# Altium PCB PA-03225-V0.4-4.PcbDoc (part 3 of 4)
Units mm, origin at the board's own origin, x right, y up, seen from the top; angles counter-clockwise.
Board outline 43 x 41 mm, 6 copper layers (Top Layer, GND, L3, L4, PWR, Bottom Layer); 103 components, 178 nets, 551 pads, 290 vias.
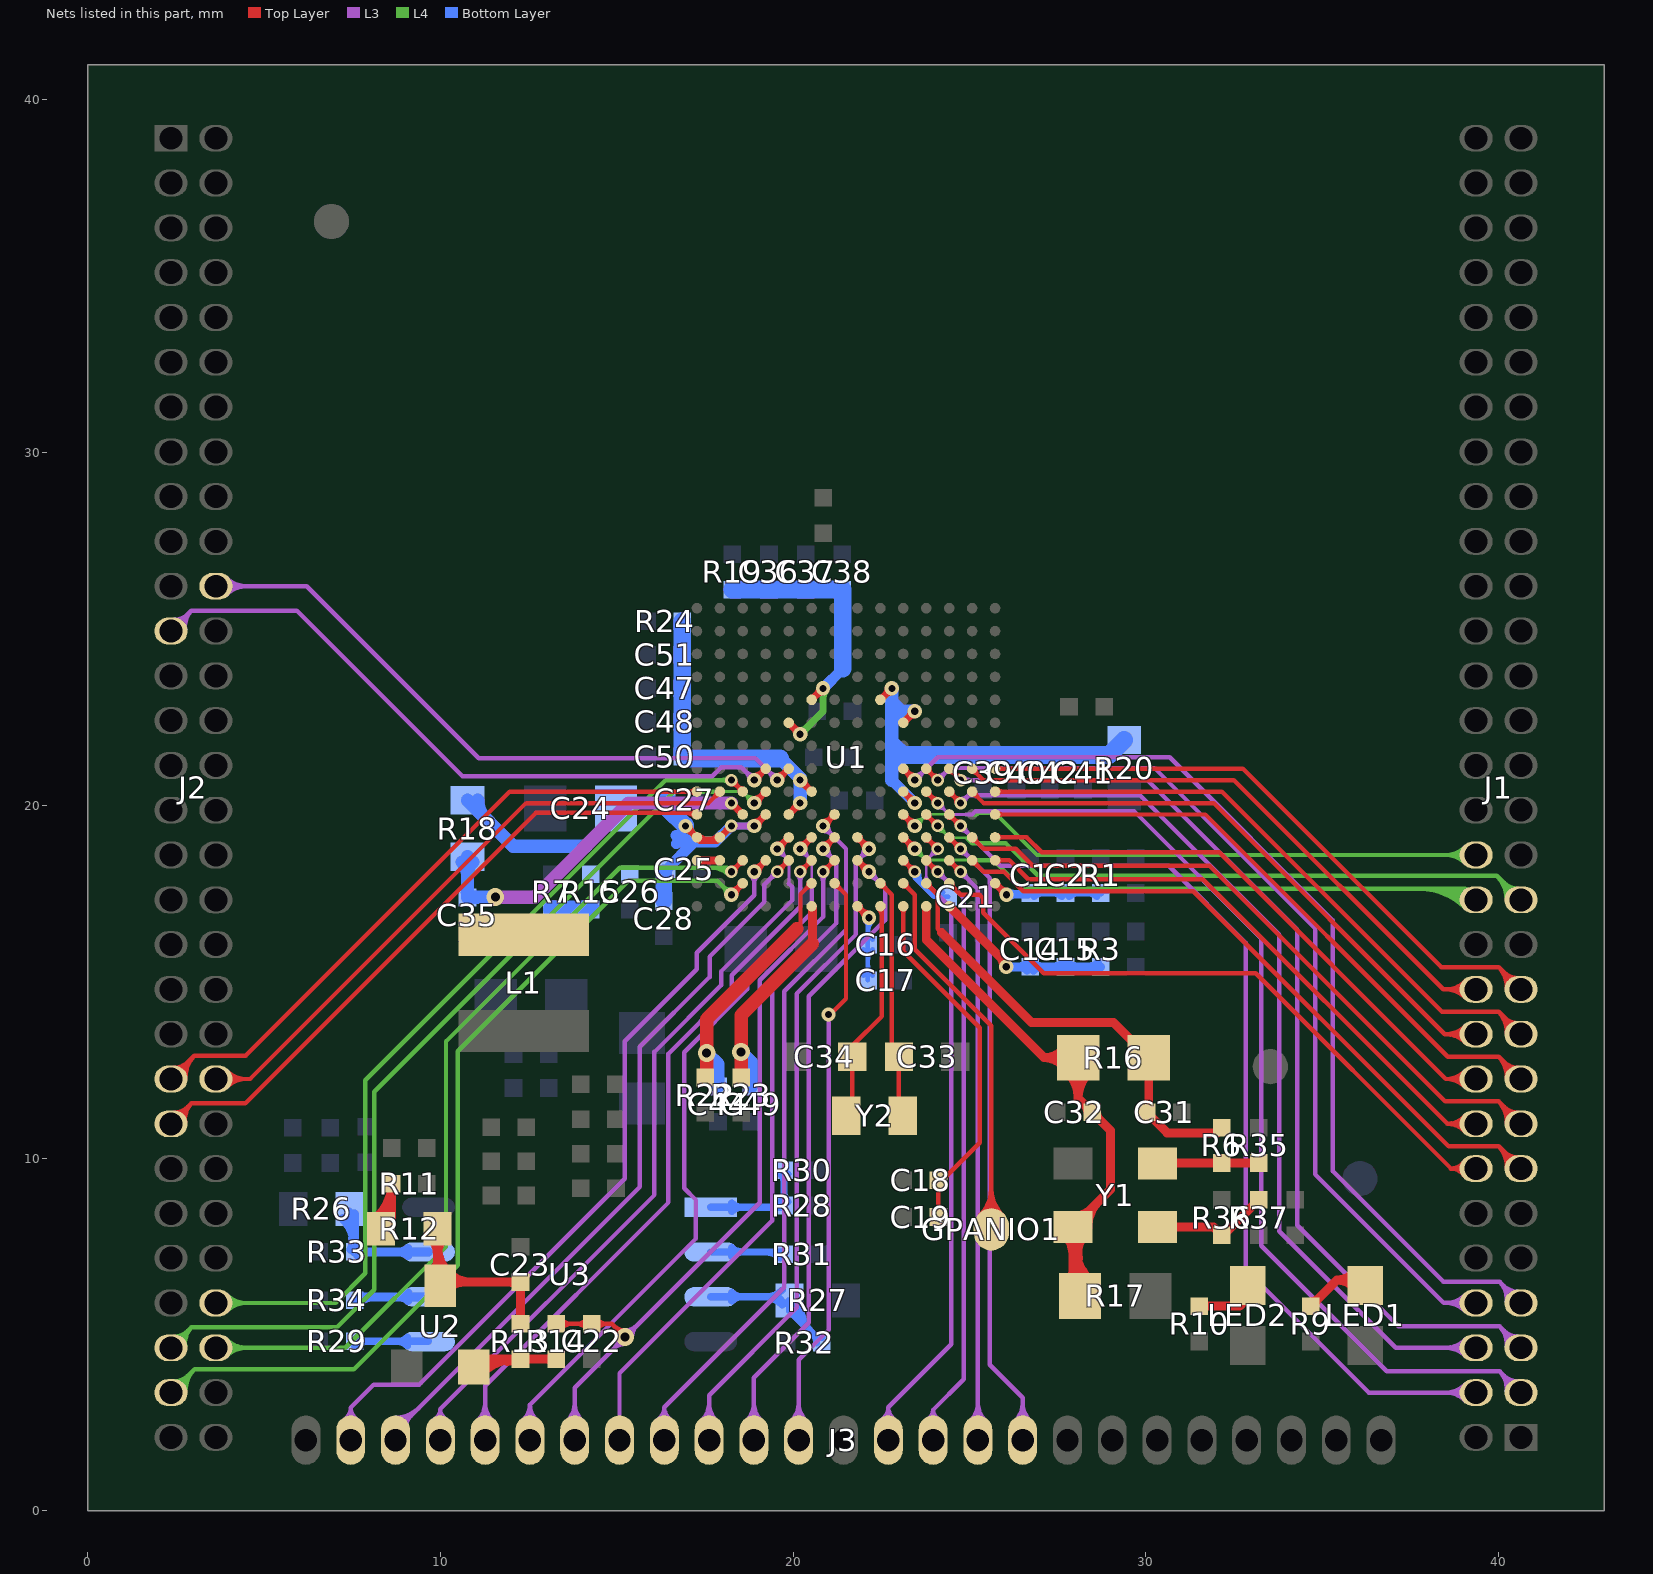
[diagram p7: the nets of this part, all layers, seen from the top]

## Via types
v1: diameter 0.508, hole 0.254, Top Layer to Bottom Layer, tented both sides, 169 vias
v2: diameter 0.406, hole 0.203, Top Layer to Bottom Layer, tented both sides, 78 vias
v3: diameter 0.356, hole 0.203, Top Layer to Bottom Layer, tented both sides, 42 vias
v4: diameter 0.7, hole 0.4, Top Layer to Bottom Layer, tented both sides, 1 vias

## Nets (pads, with @x,y where several pads share a name; then routed paths per layer and width w, separated by ;. In a path a pad name is that pad's centre, name@x,y a point inside that pad or via, vN(x,y) a via of type N, cw(c..) or ccw(c..) an arc to the next point about the centre after c; other vN are vias at no path point) (continued)
H4_SAI2_MCLK: J2.23 U1.H4 | length 23.3
  Top Layer w0.127: v2@18.889,20.858 ccw(c18.864,21.187) U1.H4@19.15,21.022 ; v2(18.9,20.719) U1.H4@19.225,21.044 ; v2@18.9,20.858 ccw(c18.9,21.196) 19.138,20.957 ccw(c19.377,20.719) v2@19.04,20.719 ; v2@18.93,20.855 ccw(c18.963,21.005) 19.096,20.928 ; v2@19.036,20.749 cw(c19.187,20.781) 19.11,20.915 ; v2@19.039,20.708 cw(c19.368,20.683) U1.H4@19.203,20.969 ; U1.H4@19.139,21.044 cw(c18.93,21.044) 19.077,20.896 cw(c19.225,20.748) U1.H4@19.225,20.957
  L3 w0.127: J2.23@2.365,24.945 2.941,25.521 ; J2.23@2.454,25.262 ccw(c2.454,25.814) 2.844,25.424 ; J2.23@2.642,24.973 cw(c3.069,25.038) 2.764,25.343 ; J2.23@2.768,24.992 cw(c3.377,25.085) 2.941,25.521 ; v2@18.76,20.719 ccw(c18.423,20.719) 18.662,20.957 ccw(c18.9,21.196) v2@18.9,20.858 ; v2(18.9,20.719) 18.532,21.087 17.968,21.087 17.709,20.828 10.628,20.828 5.935,25.521 2.941,25.521
H5_SAI2_TX_BLCK: J2.22 U1.H5 | length 23
  Top Layer w0.127: v2@19.539,20.858 ccw(c19.514,21.187) U1.H5@19.8,21.022 ; v2(19.55,20.719) U1.H5@19.875,21.044 ; v2@19.55,20.858 ccw(c19.55,21.196) 19.788,20.957 ccw(c20.027,20.719) v2@19.69,20.719 ; v2@19.58,20.855 ccw(c19.613,21.005) 19.746,20.928 ; v2@19.686,20.749 cw(c19.837,20.781) 19.76,20.915 ; v2@19.689,20.708 cw(c20.018,20.683) U1.H5@19.853,20.969 ; U1.H5@19.789,21.044 cw(c19.58,21.044) 19.727,20.896 cw(c19.875,20.748) U1.H5@19.875,20.957
  L3 w0.127: J2.22@3.635,26.215 6.21,26.215 11.088,21.336 18.933,21.336 v2(19.55,20.719) ; J2.22@3.859,26.08 cw(c4.184,25.755) 4.184,26.215 cw(c4.184,26.675) J2.22@3.859,26.349 ; J2.22@3.948,25.99 cw(c4.49,25.448) 4.49,26.215 cw(c4.49,26.981) J2.22@3.948,26.439 ; v2@19.41,20.719 ccw(c19.073,20.719) 19.312,20.957 ccw(c19.55,21.196) v2@19.55,20.858
H10: J1.7 U1.H10 | length 32.4
  Top Layer w0.127: U1.H10@23.125,20.957 cw(c23.125,20.748) 23.273,20.896 cw(c23.42,21.044) U1.H10@23.212,21.044 ; U1.H10@23.125,21.044 v2(23.45,20.719) ; U1.H10@23.147,20.969 cw(c22.982,20.683) v2@23.311,20.708 ; U1.H10@23.2,21.022 ccw(c23.486,21.187) v2@23.461,20.858 ; 23.24,20.915 cw(c23.163,20.781) v2@23.314,20.749 ; 23.254,20.928 ccw(c23.387,21.005) v2@23.42,20.855 ; v2@23.31,20.719 ccw(c22.973,20.719) 23.212,20.957 ccw(c23.45,21.196) v2@23.45,20.858
  L3 w0.127: v2(23.45,20.719) 24.1,21.369 30.677,21.369 35.306,16.74 35.306,9.627 38.431,6.502 40.028,6.502 ; v2@23.45,20.858 ccw(c23.45,21.196) 23.689,20.957 ccw(c23.927,20.719) v2@23.59,20.719 ; 40.156,6.374 ccw(c40.546,6.764) J1.7@40.546,6.213 ; 40.216,6.314 cw(c39.87,5.968) J1.7@40.357,5.915 ; J1.7@40.23,5.929 ccw(c39.531,6.004) 40.028,6.502 ; J1.7@40.635,5.895 40.028,6.502
H11_SAI1_TX_DATA0: J1.8 U1.H11 | length 29.4
  Top Layer w0.127: U1.H11@23.775,20.957 cw(c23.775,20.748) 23.923,20.896 cw(c24.07,21.044) U1.H11@23.862,21.044 ; U1.H11@23.775,21.044 v3(24.1,20.719) ; v3@23.986,20.719 ccw(c23.71,20.719) 23.905,20.914 ccw(c24.1,21.109) v3@24.1,20.833
  L3 w0.127: v3(24.1,20.719) 24.443,21.061 30.247,21.061 34.798,16.51 34.798,9.543 38.446,5.895 J1.8@39.365,5.895 ; v3@24.1,20.833 ccw(c24.1,21.109) 24.295,20.914 ccw(c24.49,20.719) v3@24.214,20.719 ; J1.8@39.052,5.67 ccw(c38.51,5.128) 38.51,5.895 ccw(c38.51,6.662) J1.8@39.052,6.12 ; J1.8@39.141,5.76 ccw(c38.816,5.435) 38.816,5.895 ccw(c38.816,6.355) J1.8@39.141,6.03
H12: J1.5 U1.H12 | length 30.6
  Top Layer w0.127: U1.H12@24.425,20.957 cw(c24.425,20.748) 24.573,20.896 cw(c24.72,21.044) U1.H12@24.512,21.044 ; U1.H12@24.425,21.044 v3(24.75,20.719) ; v3@24.636,20.719 ccw(c24.36,20.719) 24.555,20.914 ccw(c24.75,21.109) v3@24.75,20.833
  L3 w0.127: v3(24.75,20.719) 30.047,20.719 34.29,16.476 34.29,8.103 37.161,5.232 40.028,5.232 ; v3@24.831,20.638 cw(c25.026,20.443) 25.026,20.719 cw(c25.026,20.995) v3@24.831,20.799 ; 40.156,5.104 ccw(c40.546,5.494) J1.5@40.546,4.943 ; 40.216,5.044 cw(c39.87,4.698) J1.5@40.357,4.645 ; J1.5@40.23,4.659 ccw(c39.531,4.734) 40.028,5.232 ; J1.5@40.635,4.625 40.028,5.232
H13: J1.22 U1.H13 | length 19.1
  Top Layer w0.127: U1.H13@25.075,20.957 cw(c25.075,20.748) 25.223,20.896 cw(c25.37,21.044) U1.H13@25.162,21.044 ; U1.H13@25.075,21.044 25.4,20.719 32.499,20.719 38.433,14.785 J1.22@39.365,14.785 ; J1.22@39.052,14.56 ccw(c38.51,14.018) 38.51,14.785 ccw(c38.51,15.552) J1.22@39.052,15.01 ; J1.22@39.141,14.65 ccw(c38.816,14.325) 38.816,14.785 ccw(c38.816,15.245) J1.22@39.141,14.92
H14: J1.21 U1.H14 | length 19.4
  Top Layer w0.127: U1.H14@25.725,21.044 32.754,21.044 38.379,15.418 40.002,15.418 ; U1.H14@25.786,20.982 cw(c25.934,20.835) 25.934,21.044 cw(c25.934,21.252) U1.H14@25.786,21.105 ; 40.156,15.264 ccw(c40.546,15.654) J1.21@40.546,15.103 ; 40.199,15.221 cw(c39.815,14.838) J1.21@40.356,14.799 ; J1.21@40.229,14.808 ccw(c39.449,14.864) 40.002,15.418 ; J1.21@40.635,14.785 40.002,15.418
J1_LPSPI1_SDO: J2.43 U1.J1 | length 20.3
  Top Layer w0.127: J2.43@2.365,12.245 3.024,12.904 ; J2.43@2.454,12.562 ccw(c2.454,13.114) 2.844,12.724 ; J2.43@2.644,12.252 cw(c3.242,12.276) 2.819,12.699 ; J2.43@2.771,12.257 cw(c3.637,12.291) 3.024,12.904 ; U1.J1@17.214,20.332 ccw(c17.066,20.185) 17.066,20.394 ccw(c17.066,20.602) U1.J1@17.214,20.455 ; U1.J1@17.275,20.394 11.967,20.394 4.477,12.904 3.024,12.904
J2: J2.44 U1.J2 | length 19.9
  Top Layer w0.127: J2.44@3.684,12.245 4.605,12.245 12.429,20.069 17.6,20.069 U1.J2@17.925,20.394 ; J2.44@3.859,12.11 cw(c4.184,11.785) 4.184,12.245 cw(c4.184,12.705) J2.44@3.859,12.379 ; J2.44@3.948,12.02 cw(c4.49,11.478) 4.49,12.245 cw(c4.49,13.011) J2.44@3.948,12.469 ; U1.J2@17.839,20.394 cw(c17.63,20.394) 17.777,20.246 cw(c17.925,20.098) U1.J2@17.925,20.307
J3_LPSPI1_PCS0: J2.54 U1.J3 | length 27.5
  Top Layer w0.127: v3@18.25,20.604 cw(c18.25,20.328) 18.445,20.523 cw(c18.64,20.719) v3@18.364,20.719 ; v3(18.25,20.719) U1.J3@18.575,20.394 ; U1.J3@18.489,20.394 ccw(c18.28,20.394) 18.427,20.541 ccw(c18.575,20.689) U1.J3@18.575,20.48
  L4 w0.127: J2.54@3.635,5.895 7.033,5.895 7.874,6.735 7.874,12.209 16.383,20.719 v3(18.25,20.719) ; J2.54@3.859,5.76 cw(c4.184,5.435) 4.184,5.895 cw(c4.184,6.355) J2.54@3.859,6.029 ; J2.54@3.948,5.67 cw(c4.49,5.128) 4.49,5.895 cw(c4.49,6.661) J2.54@3.948,6.119 ; v3@18.169,20.638 ccw(c17.974,20.443) 17.974,20.719 ccw(c17.974,20.995) v3@18.169,20.799
J4_LPSPI1_SCK: J2.55 U1.J4 | length 31.2
  Top Layer w0.127: v2@18.889,20.208 ccw(c18.864,20.537) U1.J4@19.15,20.372 ; v2(18.9,20.069) U1.J4@19.225,20.394 ; v2@18.9,20.208 ccw(c18.9,20.546) 19.138,20.307 ccw(c19.377,20.069) v2@19.04,20.069 ; v2@18.93,20.205 ccw(c18.963,20.355) 19.096,20.278 ; v2@19.036,20.099 cw(c19.187,20.131) 19.11,20.265 ; v2@19.039,20.058 cw(c19.368,20.033) U1.J4@19.203,20.319 ; U1.J4@19.139,20.394 cw(c18.93,20.394) 19.077,20.246 cw(c19.225,20.098) U1.J4@19.225,20.307
  L4 w0.076: 17.925,20.394 18.575,20.394 v2(18.9,20.069) ; v2@18.735,20.069 ccw(c18.336,20.069) 18.618,20.35 ccw(c18.9,20.632) v2@18.9,20.234 ; v2@18.811,20.069 ccw(c18.596,20.069) 18.748,20.22 ccw(c18.9,20.372) v2@18.9,20.157
  L4 w0.127: J2.55@2.365,4.625 2.941,5.201 ; J2.55@2.454,4.942 ccw(c2.454,5.494) 2.844,5.104 ; J2.55@2.642,4.653 cw(c3.069,4.718) 2.764,5.023 ; J2.55@2.768,4.672 cw(c3.377,4.765) 2.941,5.201 ; 17.925,20.394 16.634,20.394 8.128,11.887 8.128,6.267 7.062,5.201 2.941,5.201
J11: J1.3 U1.J11 | length 31.9
  Top Layer w0.127: U1.J11@23.775,20.307 cw(c23.775,20.098) 23.923,20.246 cw(c24.07,20.394) U1.J11@23.862,20.394 ; U1.J11@23.775,20.394 v3(24.1,20.069) ; v3@23.986,20.069 ccw(c23.71,20.069) 23.905,20.264 ccw(c24.1,20.459) v3@24.1,20.183
  L3 w0.076: v3@24.1,19.929 cw(c24.1,19.592) 24.339,19.83 cw(c24.577,20.069) v3@24.24,20.069 ; v3(24.1,20.069) 24.425,19.744 24.91,19.744
  L3 w0.127: 24.91,19.744 25.075,19.744 25.171,19.84 29.665,19.84 33.274,16.231 33.274,7.518 36.83,3.962 40.028,3.962 ; 40.156,3.834 ccw(c40.546,4.224) J1.3@40.546,3.673 ; 40.216,3.774 cw(c39.87,3.428) J1.3@40.357,3.375 ; J1.3@40.23,3.389 ccw(c39.531,3.464) 40.028,3.962 ; J1.3@40.635,3.355 40.028,3.962
J12: J1.6 U1.J12 | length 28.9
  Top Layer w0.127: U1.J12@24.425,20.307 cw(c24.425,20.098) 24.573,20.246 cw(c24.72,20.394) U1.J12@24.512,20.394 ; U1.J12@24.425,20.394 v3(24.75,20.069) ; v3@24.636,20.069 ccw(c24.36,20.069) 24.555,20.264 ccw(c24.75,20.459) v3@24.75,20.183
  L3 w0.127: v3(24.75,20.069) 24.976,20.295 29.826,20.295 33.782,16.338 33.782,7.927 37.084,4.625 38.51,4.625 ; v3@24.75,20.183 ccw(c24.75,20.459) 24.945,20.264 ccw(c25.14,20.069) v3@24.864,20.069 ; J1.6@39.052,4.4 ccw(c38.51,3.858) 38.51,4.625 ; J1.6@39.052,4.85 cw(c38.51,5.392) 38.51,4.625 ; J1.6@39.141,4.49 ccw(c38.816,4.165) 38.816,4.625 ccw(c38.816,5.085) J1.6@39.141,4.76
J13: J1.20 U1.J13 | length 19.1
  Top Layer w0.127: U1.J13@25.075,20.307 cw(c25.075,20.098) 25.223,20.246 cw(c25.37,20.394) U1.J13@25.162,20.394 ; U1.J13@25.075,20.394 25.4,20.069 31.925,20.069 38.479,13.515 J1.20@39.116,13.515 ; J1.20@39.052,13.29 ccw(c38.51,12.748) 38.51,13.515 ccw(c38.51,14.282) J1.20@39.052,13.74 ; J1.20@39.141,13.38 ccw(c38.816,13.055) 38.816,13.515 ccw(c38.816,13.975) J1.20@39.141,13.65
J14_SAI1_TX_SYNC: J1.19 U1.J14 | length 19.7
  Top Layer w0.127: U1.J14@25.725,20.394 32.15,20.394 38.396,14.148 40.002,14.148 ; U1.J14@25.786,20.332 cw(c25.934,20.185) 25.934,20.394 cw(c25.934,20.602) U1.J14@25.786,20.455 ; 40.156,13.994 ccw(c40.546,14.384) J1.19@40.546,13.833 ; 40.199,13.951 cw(c39.815,13.568) J1.19@40.356,13.529 ; J1.19@40.229,13.538 ccw(c39.449,13.594) 40.002,14.148 ; J1.19@40.635,13.515 40.002,14.148
K1_LPSPI1_SDI: J2.45 U1.K1 | length 20.3
  Top Layer w0.127: J2.45@2.365,10.975 2.941,11.551 ; J2.45@2.454,11.292 ccw(c2.454,11.844) 2.844,11.454 ; J2.45@2.642,11.003 cw(c3.069,11.068) 2.764,11.373 ; J2.45@2.768,11.022 cw(c3.377,11.115) 2.941,11.551 ; 16.962,19.787 cw(c16.962,19.43) U1.K1@17.214,19.682 ; U1.K1@17.275,19.744 17.232,19.787 12.706,19.787 4.47,11.551 2.941,11.551
K7_PMIC_ON_REQ: J3.9 U1.K7 | length 23.5
  Top Layer w0.127: v2@20.839,19.558 ccw(c20.814,19.887) U1.K7@21.1,19.722 ; v2(20.85,19.419) U1.K7@21.175,19.744 ; v2@20.85,19.558 ccw(c20.85,19.896) 21.088,19.657 ccw(c21.327,19.419) v2@20.99,19.419 ; v2@20.88,19.555 ccw(c20.913,19.705) 21.046,19.628 ; v2@20.986,19.449 cw(c21.137,19.481) 21.06,19.615 ; v2@20.989,19.408 cw(c21.318,19.383) U1.K7@21.153,19.669 ; U1.K7@21.089,19.744 cw(c20.88,19.744) 21.027,19.596 cw(c21.175,19.448) U1.K7@21.175,19.657
  L3 w0.127: J3.9@16.175,2.586 ccw(c15.906,2.938) 16.349,2.938 ; J3.9@16.349,2.008 16.349,2.938 ; J3.9@16.523,2.586 cw(c16.792,2.938) 16.349,2.938 ; v2@20.85,19.279 cw(c20.85,18.942) 21.088,19.18 cw(c21.327,19.419) v2@20.99,19.419 ; v2(20.85,19.419) 21.5,18.769 21.5,16.48 19.75,14.73 19.75,6.339 16.349,2.938
K10: J1.28 U1.K10 | length 21.8
  Top Layer w0.127: U1.K10@23.125,19.657 cw(c23.125,19.448) 23.273,19.596 cw(c23.42,19.744) U1.K10@23.212,19.744 ; U1.K10@23.125,19.744 v2(23.45,19.419) ; U1.K10@23.147,19.669 cw(c22.982,19.383) v2@23.311,19.408 ; U1.K10@23.2,19.722 ccw(c23.486,19.887) v2@23.461,19.558 ; 23.24,19.615 cw(c23.163,19.481) v2@23.314,19.449 ; 23.254,19.628 ccw(c23.387,19.705) v2@23.42,19.555 ; v2@23.31,19.419 ccw(c22.973,19.419) 23.212,19.657 ccw(c23.45,19.896) v2@23.45,19.558
  L4 w0.076: v2(23.45,19.419) 23.783,19.751 24.902,19.751 24.91,19.744 ; v2@23.45,19.507 ccw(c23.45,19.722) 23.602,19.57 ccw(c23.754,19.419) v2@23.539,19.419 ; v2@23.45,19.584 ccw(c23.45,19.982) 23.732,19.7 ccw(c24.014,19.419) v2@23.615,19.419
  L4 w0.127: 24.91,19.744 25.204,19.744 25.247,19.787 25.723,19.787 26.915,18.595 J1.28@39.365,18.595 ; J1.28@39.052,18.37 ccw(c38.51,17.828) 38.51,18.595 ccw(c38.51,19.362) J1.28@39.052,18.82 ; J1.28@39.141,18.46 ccw(c38.816,18.135) 38.816,18.595 ccw(c38.816,19.055) J1.28@39.141,18.73
K11: J1.25 U1.K11 | length 20.9
  Top Layer w0.127: U1.K11@23.775,19.657 cw(c23.775,19.448) 23.923,19.596 cw(c24.07,19.744) U1.K11@23.862,19.744 ; U1.K11@23.775,19.744 v3(24.1,19.419) ; v3@23.986,19.419 ccw(c23.71,19.419) 23.905,19.614 ccw(c24.1,19.809) v3@24.1,19.533
  L4 w0.076: v3@24.1,19.279 cw(c24.1,18.942) 24.339,19.18 cw(c24.577,19.419) v3@24.24,19.419 ; v3(24.1,19.419) 24.433,19.086 24.917,19.086 24.936,19.068
  L4 w0.127: 24.936,19.068 25.081,18.923 26.035,18.923 26.949,18.009 39.951,18.009 ; 40.156,17.804 ccw(c40.546,18.194) J1.25@40.546,17.643 ; 40.165,17.795 cw(c39.704,17.334) J1.25@40.356,17.327 ; J1.25@40.229,17.329 ccw(c39.282,17.339) 39.951,18.009 ; J1.25@40.635,17.325 39.951,18.009
K12: J1.4 U1.K12 | length 30.3
  Top Layer w0.127: U1.K12@24.425,19.657 cw(c24.425,19.448) 24.573,19.596 cw(c24.72,19.744) U1.K12@24.512,19.744 ; U1.K12@24.425,19.744 v3(24.75,19.419) ; v3@24.636,19.419 ccw(c24.36,19.419) 24.555,19.614 ccw(c24.75,19.809) v3@24.75,19.533
  L3 w0.127: v3@24.75,19.304 cw(c24.75,19.028) 24.945,19.223 cw(c25.14,19.419) v3@24.864,19.419 ; v3(24.75,19.419) 25.881,18.288 30.647,18.288 32.834,16.101 32.834,6.843 36.322,3.355 J1.4@39.365,3.355 ; J1.4@39.052,3.13 ccw(c38.51,2.588) 38.51,3.355 ccw(c38.51,4.122) J1.4@39.052,3.58 ; J1.4@39.141,3.22 ccw(c38.816,2.895) 38.816,3.355 ccw(c38.816,3.815) J1.4@39.141,3.49
K14_LPUART1_TX: J1.17 U1.K14 | length 19.9
  Top Layer w0.127: U1.K14@25.725,19.744 31.691,19.744 38.557,12.878 40.002,12.878 ; U1.K14@25.786,19.682 cw(c25.934,19.535) 25.934,19.744 cw(c25.934,19.952) U1.K14@25.786,19.805 ; 40.156,12.724 ccw(c40.546,13.114) J1.17@40.546,12.563 ; 40.199,12.681 cw(c39.815,12.298) J1.17@40.356,12.259 ; J1.17@40.229,12.268 ccw(c39.449,12.324) 40.002,12.878 ; J1.17@40.635,12.245 40.002,12.878
L5: J3.4 U1.L5 | length 25.1
  Top Layer w0.127: v2@19.539,18.908 ccw(c19.514,19.237) U1.L5@19.8,19.072 ; v2(19.55,18.769) U1.L5@19.875,19.094 ; v2@19.55,18.908 ccw(c19.55,19.246) 19.788,19.007 ccw(c20.027,18.769) v2@19.69,18.769 ; v2@19.58,18.905 ccw(c19.613,19.055) 19.746,18.978 ; v2@19.686,18.799 cw(c19.837,18.831) 19.76,18.965 ; v2@19.689,18.758 cw(c20.018,18.733) U1.L5@19.853,19.019 ; U1.L5@19.789,19.094 cw(c19.58,19.094) 19.727,18.946 cw(c19.875,18.798) U1.L5@19.875,19.007
  L3 w0.076: v2@19.55,18.603 cw(c19.55,18.205) 19.832,18.487 cw(c20.114,18.769) v2@19.715,18.769 ; v2@19.55,18.68 cw(c19.55,18.465) 19.702,18.617 cw(c19.854,18.769) v2@19.639,18.769 ; v2(19.55,18.769) 19.882,18.436 19.882,17.786
  L3 w0.127: J3.4@9.842,2.598 ccw(c9.654,2.887) 9.999,2.887 ; J3.4@9.999,2.008 9.999,2.887 ; J3.4@10.156,2.598 cw(c10.344,2.887) 9.999,2.887 ; 19.882,17.786 19.971,17.697 19.971,17.306 17.958,15.293 17.958,14.901 16.07,13.013 16.07,8.958 9.999,2.887
L6_USER_BUTTON: J3.6 U1.L6 | length 25.3
  Top Layer w0.127: v2@20.189,18.908 ccw(c20.164,19.237) U1.L6@20.45,19.072 ; v2(20.2,18.769) U1.L6@20.525,19.094 ; v2@20.2,18.908 ccw(c20.2,19.246) 20.438,19.007 ccw(c20.677,18.769) v2@20.34,18.769 ; v2@20.23,18.905 ccw(c20.263,19.055) 20.396,18.978 ; v2@20.336,18.799 cw(c20.487,18.831) 20.41,18.965 ; v2@20.339,18.758 cw(c20.668,18.733) U1.L6@20.503,19.019 ; U1.L6@20.439,19.094 cw(c20.23,19.094) 20.377,18.946 cw(c20.525,18.798) U1.L6@20.525,19.007
  L3 w0.076: v2@20.2,18.603 cw(c20.2,18.205) 20.482,18.487 cw(c20.764,18.769) v2@20.365,18.769 ; v2@20.2,18.68 cw(c20.2,18.465) 20.352,18.617 cw(c20.504,18.769) v2@20.289,18.769 ; v2(20.2,18.769) 20.525,18.444 20.525,17.794
  L3 w0.127: J3.6@12.344,2.568 ccw(c11.931,3.014) 12.539,3.014 ; J3.6@12.431,2.475 ccw(c12.201,2.723) 12.539,2.723 ccw(c12.877,2.723) J3.6@12.647,2.475 ; J3.6@12.539,2.008 12.539,3.014 ; J3.6@12.734,2.568 cw(c13.147,3.014) 12.539,3.014 ; 20.525,17.794 20.525,16.967 18.694,15.136 18.694,14.783 16.916,13.005 16.916,9.144 17.247,8.814 17.247,7.722 12.539,3.014
L7_PERI_PWREN: J3.8 U1.L7 | length 22.3
  Top Layer w0.127: v2@20.839,18.908 ccw(c20.814,19.237) U1.L7@21.1,19.072 ; v2(20.85,18.769) U1.L7@21.175,19.094 ; v2@20.85,18.908 ccw(c20.85,19.246) 21.088,19.007 ccw(c21.327,18.769) v2@20.99,18.769 ; v2@20.88,18.905 ccw(c20.913,19.055) 21.046,18.978 ; v2@20.986,18.799 cw(c21.137,18.831) 21.06,18.965 ; v2@20.989,18.758 cw(c21.318,18.733) U1.L7@21.153,19.019 ; U1.L7@21.089,19.094 cw(c20.88,19.094) 21.027,18.946 cw(c21.175,18.798) U1.L7@21.175,19.007
  L3 w0.127: J3.8@15.079,2.008 15.079,3.903 19.403,8.227 19.403,8.839 19.405,14.84 21.218,16.654 21.218,18.4 v2(20.85,18.769) ; v2@20.85,18.629 cw(c20.85,18.292) 21.088,18.53 cw(c21.327,18.769) v2@20.99,18.769
L8_USB_OTG1_DP: J3.10 U1.L8 | length 23.2
  Top Layer w0.127: U1.L8@21.825,19.007 cw(c21.825,18.798) 21.973,18.946 cw(c22.12,19.094) U1.L8@21.912,19.094 ; U1.L8@21.825,19.094 v2(22.15,18.769) ; U1.L8@21.847,19.019 cw(c21.682,18.733) v2@22.011,18.758 ; U1.L8@21.9,19.072 ccw(c22.186,19.237) v2@22.161,18.908 ; 21.94,18.965 cw(c21.863,18.831) v2@22.014,18.799 ; 21.954,18.978 ccw(c22.087,19.055) v2@22.12,18.905 ; v2@22.01,18.769 ccw(c21.673,18.769) 21.912,19.007 ccw(c22.15,19.246) v2@22.15,18.908
  L3 w0.127: J3.10@17.416,2.561 ccw(c16.927,3.05) 17.619,3.05 ccw(c18.311,3.05) J3.10@17.822,2.561 ; J3.10@17.506,2.471 ccw(c17.234,2.743) 17.619,2.743 ccw(c18.004,2.743) J3.10@17.732,2.471 ; J3.10@17.619,2.008 17.619,3.278 20.099,5.758 20.099,14.66 21.782,16.343 21.782,18.4 v2(22.15,18.769) ; v2@22.01,18.769 cw(c21.673,18.769) 21.912,18.53 cw(c22.15,18.292) v2@22.15,18.629
L10: J1.26 U1.L10 | length 24.6
  Top Layer w0.127: U1.L10@23.125,19.007 cw(c23.125,18.798) 23.273,18.946 cw(c23.42,19.094) U1.L10@23.212,19.094 ; U1.L10@23.125,19.094 v2(23.45,18.769) ; U1.L10@23.147,19.019 cw(c22.982,18.733) v2@23.311,18.758 ; U1.L10@23.2,19.072 ccw(c23.486,19.237) v2@23.461,18.908 ; 23.24,18.965 cw(c23.163,18.831) v2@23.314,18.799 ; 23.254,18.978 ccw(c23.387,19.055) v2@23.42,18.905 ; v2@23.31,18.769 ccw(c22.973,18.769) 23.212,19.007 ccw(c23.45,19.246) v2@23.45,18.908
  L4 w0.076: v2@23.45,18.603 cw(c23.45,18.205) 23.732,18.487 cw(c24.014,18.769) v2@23.615,18.769 ; v2@23.45,18.68 cw(c23.45,18.465) 23.602,18.617 cw(c23.754,18.769) v2@23.539,18.769 ; v2(23.45,18.769) 23.768,18.451 25.019,18.451
  L4 w0.127: 25.019,18.451 25.677,18.451 26.489,17.638 39.052,17.638 J1.26@39.365,17.325 ; 37.753,17.638 cw(c37.753,15.802) J1.26@39.052,17.1 ; 38.06,17.638 cw(c38.06,16.109) J1.26@39.141,17.19 ; 38.366,17.638 cw(c38.366,16.415) J1.26@39.231,17.28 ; 38.673,17.638 cw(c38.673,16.722) J1.26@39.321,17.37 ; 38.98,17.638 cw(c38.98,17.029) J1.26@39.411,17.46
L11_LPUART2_TX: J3.14 U1.L11 | length 20.5
  Top Layer w0.127: U1.L11@23.775,19.007 cw(c23.775,18.798) 23.923,18.946 cw(c24.07,19.094) U1.L11@23.862,19.094 ; U1.L11@23.775,19.094 v3(24.1,18.769) ; v3@23.986,18.769 ccw(c23.71,18.769) 23.905,18.964 ccw(c24.1,19.159) v3@24.1,18.883
  L3 w0.076: 23.775,17.941 23.775,18.444 v3(24.1,18.769) ; v3@23.96,18.769 cw(c23.623,18.769) 23.862,18.53 cw(c24.1,18.292) v3@24.1,18.629
  L3 w0.127: J3.14@22.524,2.584 ccw(c22.246,2.942) 22.699,2.942 ; J3.14@22.699,2.008 22.699,2.942 ; J3.14@22.874,2.584 cw(c23.152,2.942) 22.699,2.942 ; 23.775,17.941 23.775,17.794 24.486,17.083 24.486,4.729 22.699,2.942
L12: J3.17 U1.L12 | length 20.8
  Top Layer w0.127: U1.L12@24.425,19.007 cw(c24.425,18.798) 24.573,18.946 cw(c24.72,19.094) U1.L12@24.512,19.094 ; U1.L12@24.425,19.094 v3(24.75,18.769) ; v3@24.636,18.769 ccw(c24.36,18.769) 24.555,18.964 ccw(c24.75,19.159) v3@24.75,18.883
  L3 w0.127: v3@24.75,18.654 cw(c24.75,18.378) 24.945,18.573 cw(c25.14,18.769) v3@24.864,18.769 ; v3(24.75,18.769) 25.578,17.941 25.578,4.14 26.509,3.209 J3.17@26.509,2.008 ; J3.17@26.306,2.561 ccw(c25.817,3.05) 26.509,3.05 ccw(c27.201,3.05) J3.17@26.712,2.561 ; J3.17@26.396,2.471 ccw(c26.124,2.743) 26.509,2.743 ccw(c26.894,2.743) J3.17@26.622,2.471
L13: J1.15 U1.L13 | length 20.8
  Top Layer w0.127: U1.L13@25.075,19.007 cw(c25.075,18.798) 25.223,18.946 cw(c25.37,19.094) U1.L13@25.162,19.094 ; U1.L13@25.075,19.094 25.4,18.769 26.316,18.769 26.797,18.288 31.807,18.288 38.487,11.608 40.002,11.608 ; 40.156,11.454 ccw(c40.546,11.844) J1.15@40.546,11.293 ; 40.199,11.411 cw(c39.815,11.028) J1.15@40.356,10.989 ; J1.15@40.229,10.998 ccw(c39.449,11.054) 40.002,11.608 ; J1.15@40.635,10.975 40.002,11.608
L14_LPUART1_RX: J1.18 U1.L14 | length 19.1
  Top Layer w0.127: U1.L14@25.725,19.094 26.626,19.094 27.051,18.669 32.08,18.669 38.504,12.245 J1.18@39.116,12.245 ; U1.L14@25.786,19.032 cw(c25.934,18.885) 25.934,19.094 cw(c25.934,19.302) U1.L14@25.786,19.155 ; J1.18@38.999,12.089 ccw(c38.733,11.939) 38.733,12.245 ccw(c38.733,12.551) J1.18@38.999,12.401 ; J1.18@39.052,12.02 ccw(c38.51,11.478) 38.51,12.245 ccw(c38.51,13.012) J1.18@39.052,12.47 ; J1.18@39.141,12.11 ccw(c38.816,11.785) 38.816,12.245 ccw(c38.816,12.705) J1.18@39.141,12.38
M3: J2.56 U1.M3 | length 27.7
  Top Layer w0.127: v3(18.25,18.119) U1.M3@18.575,18.444 ; v3@18.25,18.233 ccw(c18.25,18.509) 18.445,18.314 ccw(c18.64,18.119) v3@18.364,18.119 ; U1.M3@18.489,18.444 cw(c18.28,18.444) 18.427,18.296 cw(c18.575,18.148) U1.M3@18.575,18.357
  L4 w0.127: J2.56@3.635,4.625 7.301,4.625 10.16,7.483 10.16,13.31 15.088,18.237 18.131,18.237 v3(18.25,18.119) ; J2.56@3.859,4.49 cw(c4.184,4.165) 4.184,4.625 cw(c4.184,5.085) J2.56@3.859,4.759 ; J2.56@3.948,4.4 cw(c4.49,3.858) 4.49,4.625 cw(c4.49,5.391) J2.56@3.948,4.849 ; 17.688,18.237 cw(c17.688,17.556) v3@18.169,18.038 ; 17.994,18.237 cw(c17.994,17.863) v3@18.259,18.128
M4: J3.2 U1.M4 | length 25.3
  Top Layer w0.127: v2@18.889,18.258 ccw(c18.864,18.587) U1.M4@19.15,18.422 ; v2(18.9,18.119) U1.M4@19.225,18.444 ; v2@18.9,18.258 ccw(c18.9,18.596) 19.138,18.357 ccw(c19.377,18.119) v2@19.04,18.119 ; v2@18.93,18.255 ccw(c18.963,18.405) 19.096,18.328 ; v2@19.036,18.149 cw(c19.187,18.181) 19.11,18.315 ; v2@19.039,18.108 cw(c19.368,18.083) U1.M4@19.203,18.369 ; U1.M4@19.139,18.444 cw(c18.93,18.444) 19.077,18.296 cw(c19.225,18.148) U1.M4@19.225,18.357
  L3 w0.127: J3.2@7.288,2.588 ccw(c7.032,2.93) 7.459,2.93 ; J3.2@7.459,2.008 7.459,2.93 ; J3.2@7.63,2.588 cw(c7.886,2.93) 7.459,2.93 ; v2@18.801,18.02 cw(c18.563,17.781) 18.9,17.781 cw(c19.237,17.781) v2@18.999,18.02 ; v2(18.9,18.119) 18.9,17.452 17.272,15.824 17.272,15.358 15.231,13.317 15.231,9.414 9.399,3.581 8.111,3.581 7.459,2.93
M5: J3.3 U1.M5 | length 23.8
  Top Layer w0.127: v3(19.55,18.119) U1.M5@19.875,18.444 ; v3@19.55,18.233 ccw(c19.55,18.509) 19.745,18.314 ccw(c19.94,18.119) v3@19.664,18.119 ; U1.M5@19.789,18.444 cw(c19.58,18.444) 19.727,18.296 cw(c19.875,18.148) U1.M5@19.875,18.357
  L3 w0.127: J3.3@8.729,2.008 8.729,2.259 15.655,9.184 15.655,13.156 17.632,15.134 17.632,15.715 19.182,17.264 19.182,17.75 v3(19.55,18.119) ; J3.3@8.729,2.517 ccw(c8.729,3.142) 9.171,2.7 ; J3.3@8.729,2.644 ccw(c8.729,3.576) 9.387,2.917 ; J3.3@9.016,2.358 cw(c9.468,2.358) 9.148,2.678 ; v3@19.436,18.119 cw(c19.16,18.119) 19.355,17.923 cw(c19.55,17.728) v3@19.55,18.004
M6_ONOFF: J3.5 U1.M6 | length 23.2
  Top Layer w0.127: v3(20.2,18.119) U1.M6@20.525,18.444 ; v3@20.2,18.233 ccw(c20.2,18.509) 20.395,18.314 ccw(c20.59,18.119) v3@20.314,18.119 ; U1.M6@20.439,18.444 cw(c20.23,18.444) 20.377,18.296 cw(c20.525,18.148) U1.M6@20.525,18.357
  L3 w0.127: J3.5@11.066,2.561 ccw(c10.577,3.05) 11.269,3.05 ccw(c11.961,3.05) J3.5@11.472,2.561 ; J3.5@11.156,2.471 ccw(c10.884,2.743) 11.269,2.743 ccw(c11.654,2.743) J3.5@11.382,2.471 ; J3.5@11.269,2.008 11.269,3.547 16.467,8.746 16.467,12.965 18.263,14.76 18.263,15.186 20.2,17.124 v3(20.2,18.119) ; v3@20.119,18.038 cw(c19.924,17.843) 20.2,17.843 cw(c20.476,17.843) v3@20.281,18.038
M7_POR_B: C22.2 J3.7 R14.2 U1.M7 | length 28.8
  Top Layer w0.127: R14.2@13.284,5.304 C22.2@14.296,5.304 14.861,5.304 v1(15.24,4.926) ; R14.2@13.416,5.173 cw(c13.734,4.854) 13.734,5.304 cw(c13.734,5.755) R14.2@13.416,5.436 ; C22.2@14.164,5.173 ccw(c13.846,4.854) 13.846,5.304 ccw(c13.846,5.755) C22.2@14.164,5.436 ; C22.2@14.428,5.173 cw(c14.746,4.854) 14.746,5.304 cw(c14.746,5.755) C22.2@14.428,5.436 ; v1@15.049,4.926 ccw(c14.59,4.926) 14.915,5.251 ccw(c15.24,5.576) v1@15.24,5.116 ; v3(20.85,18.119) U1.M7@21.175,18.444 ; v3@20.85,18.233 ccw(c20.85,18.509) 21.045,18.314 ccw(c21.24,18.119) v3@20.964,18.119 ; U1.M7@21.089,18.444 cw(c20.88,18.444) 21.027,18.296 cw(c21.175,18.148) U1.M7@21.175,18.357
  L3 w0.127: J3.7@13.606,2.561 ccw(c13.117,3.05) 13.809,3.05 ccw(c14.501,3.05) J3.7@14.012,2.561 ; J3.7@13.696,2.471 ccw(c13.424,2.743) 13.809,2.743 ccw(c14.194,2.743) J3.7@13.922,2.471 ; J3.7@13.809,2.008 13.809,3.495 v1(15.24,4.926) 19.053,8.739 19.053,15.043 20.85,16.84 v3(20.85,18.119) ; v1@15.049,4.926 cw(c14.59,4.926) 14.915,4.601 cw(c15.24,4.275) v1@15.24,4.735 ; v1@15.24,5.116 ccw(c15.24,5.576) 15.565,5.251 ccw(c15.89,4.926) v1@15.43,4.926 ; v3@20.769,18.038 cw(c20.574,17.843) 20.85,17.843 cw(c21.126,17.843) v3@20.931,18.038
M8_USB_OTG1_DN: J3.11 U1.M8 | length 22.4
  Top Layer w0.127: U1.M8@21.825,18.357 cw(c21.825,18.148) 21.973,18.296 cw(c22.12,18.444) U1.M8@21.912,18.444 ; U1.M8@21.825,18.444 v2(22.15,18.119) ; U1.M8@21.847,18.369 cw(c21.682,18.083) v2@22.011,18.108 ; U1.M8@21.9,18.422 ccw(c22.186,18.587) v2@22.161,18.258 ; 21.94,18.315 cw(c21.863,18.181) v2@22.014,18.149 ; 21.954,18.328 ccw(c22.087,18.405) v2@22.12,18.255 ; v2@22.01,18.119 ccw(c21.673,18.119) 21.912,18.357 ccw(c22.15,18.596) v2@22.15,18.258
  L3 w0.127: J3.11@18.686,2.561 ccw(c18.197,3.05) 18.889,3.05 ccw(c19.581,3.05) J3.11@19.092,2.561 ; J3.11@18.776,2.471 ccw(c18.504,2.743) 18.889,2.743 ccw(c19.274,2.743) J3.11@19.002,2.471 ; J3.11@18.889,2.008 18.889,3.776 20.447,5.334 20.447,14.591 22.606,16.75 22.606,17.663 v2(22.15,18.119) ; v2@22.15,17.979 cw(c22.15,17.642) 22.389,17.88 cw(c22.627,18.119) v2@22.29,18.119
M11_CAN2_TXD: J3.15 U1.M11 | length 19.1
  Top Layer w0.127: U1.M11@23.775,18.357 cw(c23.775,18.148) 23.923,18.296 cw(c24.07,18.444) U1.M11@23.862,18.444 ; U1.M11@23.775,18.444 v3(24.1,18.119) ; v3@23.986,18.119 ccw(c23.71,18.119) 23.905,18.314 ccw(c24.1,18.509) v3@24.1,18.233
  L3 w0.127: J3.15@23.822,2.604 ccw(c23.667,2.863) 23.969,2.863 ; J3.15@23.969,2.008 23.969,2.863 ; v3@24.1,18.004 cw(c24.1,17.728) 24.295,17.923 cw(c24.49,18.119) v3@24.214,18.119 ; v3(24.1,18.119) 24.841,17.377 24.841,3.735 23.969,2.863 ; J3.15@24.116,2.604 cw(c24.271,2.863) 23.969,2.863
M12_LPUART2_RX: J3.16 U1.M12 | length 19.7
  Top Layer w0.127: U1.M12@24.425,18.357 cw(c24.425,18.148) 24.573,18.296 cw(c24.72,18.444) U1.M12@24.512,18.444 ; U1.M12@24.425,18.444 v3(24.75,18.119) ; v3@24.636,18.119 ccw(c24.36,18.119) 24.555,18.314 ccw(c24.75,18.509) v3@24.75,18.233
  L3 w0.127: v3@24.75,18.004 cw(c24.75,17.728) 24.945,17.923 cw(c25.14,18.119) v3@24.864,18.119 ; v3(24.75,18.119) 25.239,17.63 J3.16@25.239,2.008 ; J3.16@25.036,2.561 ccw(c24.547,3.05) 25.239,3.05 ccw(c25.931,3.05) J3.16@25.442,2.561 ; J3.16@25.126,2.471 ccw(c24.854,2.743) 25.239,2.743 ccw(c25.624,2.743) J3.16@25.352,2.471
M13_SAI1_MCLK: J1.13 U1.M13 | length 21.1
  Top Layer w0.127: U1.M13@25.075,18.357 cw(c25.075,18.148) 25.223,18.296 cw(c25.37,18.444) U1.M13@25.162,18.444 ; U1.M13@25.075,18.444 25.4,18.119 25.979,18.119 26.526,17.572 31.348,17.572 38.583,10.338 40.002,10.338 ; 40.156,10.184 ccw(c40.546,10.574) J1.13@40.546,10.023 ; 40.199,10.141 cw(c39.815,9.758) J1.13@40.356,9.719 ; J1.13@40.229,9.728 ccw(c39.449,9.784) 40.002,10.338 ; J1.13@40.635,9.705 40.002,10.338
M14: J1.16 U1.M14 | length 19.2
  Top Layer w0.127: U1.M14@25.725,18.444 26.133,18.444 26.67,17.907 31.618,17.907 38.55,10.975 ; U1.M14@25.786,18.382 cw(c25.934,18.235) 25.934,18.444 cw(c25.934,18.652) U1.M14@25.786,18.505 ; J1.16@38.978,10.865 ccw(c38.821,10.807) 38.821,10.975 ccw(c38.821,11.143) J1.16@38.978,11.085 ; J1.16@39.043,10.759 ccw(c38.55,10.304) 38.55,10.975 ; J1.16@39.043,11.191 cw(c38.55,11.646) 38.55,10.975 ; J1.16@39.136,10.846 ccw(c38.84,10.572) 38.84,10.975 ccw(c38.84,11.378) J1.16@39.136,11.104 ; J1.16@39.365,10.975 38.55,10.975
MCU_DCDC_IN: C24.2 C25.1 C26.1 C27.1 C28.1 R15.1 R18.2 U1.K4 U1.L1 U1.L2 | length 23.1
  Top Layer w0.203: v2@16.95,19.317 cw(c16.95,19.072) 17.123,19.245 cw(c17.297,19.419) v2@17.052,19.419 ; v2(16.95,19.419) U1.L1@17.275,19.094 17.356,19.012 17.844,19.012 U1.L2@17.925,19.094 v3(18.25,19.419) ; U1.L1@17.309,19.128 ccw(c17.588,19.407) 17.588,19.012 ; 17.612,19.012 ccw(c17.612,19.407) U1.L2@17.891,19.128 ; v2(18.9,19.419) U1.K4@19.225,19.744 ; 18.12,19.289 cw(c18.25,19.158) 18.25,19.342 ccw(c18.25,19.158) 18.12,19.289 ; 18.12,19.289 ccw(c17.99,19.419) 18.174,19.419 cw(c17.99,19.419) 18.12,19.289 ; v2@18.9,19.52 ccw(c18.9,19.765) 19.073,19.592 ; v2@18.9,19.52 ccw(c18.9,19.765) 19.073,19.592 ; v2@18.9,19.52 ccw(c18.9,19.765) 19.073,19.592 ; v2@19.002,19.419 cw(c19.247,19.419) 19.073,19.592 ; v2@19.002,19.419 cw(c19.247,19.419) 19.073,19.592 ; v2@19.002,19.419 cw(c19.247,19.419) 19.073,19.592
  L3 w0.203: v3(18.25,19.419) v2(18.9,19.419) ; 18.434,19.419 cw(c18.434,19.603) 18.304,19.473 ccw(c18.434,19.603) 18.434,19.419 ; 18.434,19.419 ccw(c18.434,19.235) 18.304,19.365 cw(c18.434,19.235) 18.434,19.419 ; 18.655,19.419 cw(c18.655,19.173) v2@18.828,19.347 ; 18.655,19.419 ccw(c18.655,19.664) v2@18.828,19.49 ; 18.655,19.419 cw(c18.655,19.173) v2@18.828,19.347 ; 18.655,19.419 ccw(c18.655,19.664) v2@18.828,19.49 ; 18.655,19.419 cw(c18.655,19.173) v2@18.828,19.347 ; 18.655,19.419 ccw(c18.655,19.664) v2@18.828,19.49
  L4 w0.203: v2@16.95,19.317 cw(c16.95,19.072) 17.123,19.245 cw(c17.297,19.419) v2@17.052,19.419 ; v2(16.95,19.419) 17.356,19.012 17.844,19.012 v3(18.25,19.419) v2(18.9,19.419) ; v3@18.304,19.365 cw(c18.434,19.235) 18.434,19.419 cw(c18.434,19.603) v3@18.304,19.473 ; 18.12,19.289 cw(c18.25,19.158) 18.25,19.342 ccw(c18.25,19.158) 18.12,19.289 ; 18.12,19.289 ccw(c17.99,19.419) 18.174,19.419 cw(c17.99,19.419) 18.12,19.289 ; 18.655,19.419 cw(c18.655,19.173) 18.828,19.347 ccw(c18.655,19.173) 18.655,19.419 ; 18.655,19.419 ccw(c18.655,19.664) 18.828,19.49 cw(c18.655,19.664) 18.655,19.419
  Bottom Layer w0.203: v3(18.25,19.419) v2(18.9,19.419) ; v3@18.304,19.365 cw(c18.434,19.235) 18.434,19.419 cw(c18.434,19.603) v3@18.304,19.473 ; v2@18.828,19.347 ccw(c18.655,19.173) 18.655,19.419 ccw(c18.655,19.664) v2@18.828,19.49
  Bottom Layer w0.305: C25.1@16.416,18.186 17.191,18.961 ; 16.682,19.145 17.139,19.145 ; 16.688,18.912 16.737,18.961 17.191,18.961 ; v2@16.942,19.426 16.942,19.342 17.139,19.145 ; v3(18.25,19.419) 18.247,19.419 17.789,18.961 17.323,18.961 ; 17.139,19.145 17.323,18.961 ; 17.191,18.961 17.323,18.961
  Bottom Layer w0.381: R18.2@10.77,20.145 12.068,18.847 14.118,18.847 ; R18.2@11.059,20.145 ccw(c11.758,20.145) 11.264,19.651
  Bottom Layer w0.457: C28.1@16.332,17.289 C25.1@16.332,18.102
  Bottom Layer w0.508: C27.1@16.412,20.168 ccw(c16.923,20.168) 16.562,19.807 ; 16.48,19.888 v2@16.942,19.426
MCU_DCDC_IN_3V3: R7.2 R15.2 | length 1.1
  Bottom Layer w0.508: R7.2@13.165,17.05 R15.2@14.266,17.05
N3: J2.57 U1.N3 | length 30.2
  Top Layer w0.127: v2@18.239,17.608 ccw(c18.214,17.937) U1.N3@18.5,17.772 ; v2(18.25,17.469) U1.N3@18.575,17.794 ; v2@18.25,17.608 ccw(c18.25,17.946) 18.488,17.707 ccw(c18.727,17.469) v2@18.39,17.469 ; v2@18.28,17.605 ccw(c18.313,17.755) 18.446,17.678 ; v2@18.386,17.499 cw(c18.537,17.531) 18.46,17.665 ; v2@18.389,17.458 cw(c18.718,17.433) U1.N3@18.553,17.719 ; U1.N3@18.489,17.794 cw(c18.28,17.794) 18.427,17.646 cw(c18.575,17.498) U1.N3@18.575,17.707
  L4 w0.127: J2.57@2.365,3.355 3.031,4.021 ; J2.57@2.454,3.672 ccw(c2.454,4.224) 2.844,3.834 ; J2.57@2.644,3.361 cw(c3.257,3.38) 2.824,3.813 ; J2.57@2.771,3.365 cw(c3.659,3.392) 3.031,4.021 ; v2@18.11,17.469 ccw(c17.773,17.469) 18.012,17.707 ccw(c18.25,17.946) v2@18.25,17.608 ; v2(18.25,17.469) 17.856,17.862 15.322,17.862 10.49,13.03 10.49,6.96 7.551,4.021 3.031,4.021
N7_USB_OTG2_DN: J3.12 U1.N7 | length 18.6
  Top Layer w0.127: v2(21.006,14.072) 21.055,14.072 21.5,14.517 21.5,17.469 U1.N7@21.175,17.794 ; U1.N7@21.175,17.707 cw(c21.175,17.498) 21.323,17.646 cw(c21.47,17.794) U1.N7@21.262,17.794
  L3 w0.127: J3.12@19.956,2.561 ccw(c19.467,3.05) 20.159,3.05 ccw(c20.851,3.05) J3.12@20.362,2.561 ; J3.12@20.046,2.471 ccw(c19.774,2.743) 20.159,2.743 ccw(c20.544,2.743) J3.12@20.272,2.471 ; J3.12@20.159,2.008 20.159,4.284 21.006,5.131 v2(21.006,14.072) ; v2@21.044,14.034 v2@21.082,14.072
N12_USB_OTG1_CHD: J1.14 U1.N12 | length 19.7
  Top Layer w0.127: U1.N12@24.425,17.707 cw(c24.425,17.498) 24.573,17.646 cw(c24.72,17.794) U1.N12@24.512,17.794 ; U1.N12@24.425,17.794 24.75,17.469 25.298,17.469 25.298,17.458 25.39,17.366 25.39,16.958 27.108,15.24 33.115,15.24 38.65,9.705 ; J1.14@39.02,9.517 ccw(c38.65,9.246) 38.65,9.705 ; J1.14@39.02,9.893 cw(c38.65,10.164) 38.65,9.705 ; J1.14@39.365,9.705 38.65,9.705
NetC1_1: C1.1 C2.1 R1.2 U1.N14 | length 6.9
  Top Layer w0.203: U1.N14@25.725,17.794 v2(26.05,17.469) ; v2@25.948,17.469 ccw(c25.703,17.469) 25.877,17.642 ccw(c26.05,17.815) v2@26.05,17.57
  Bottom Layer w0.203: v2(26.05,17.469) 26.673,17.469 C1.1@26.724,17.519 C2.1@27.722,17.519 R1.2@28.72,17.519 ; v2@26.101,17.557 ccw(c26.309,17.917) 26.417,17.515 ; v2@26.122,17.397 cw(c26.295,17.223) 26.295,17.469 cw(c26.295,17.714) v2@26.122,17.54 ; v2@26.243,17.469 ccw(c26.243,18) C1.1@26.619,17.624 ; C1.1@26.829,17.414 cw(c27.082,17.161) 27.082,17.519 cw(c27.082,17.878) C1.1@26.829,17.624 ; C2.1@27.617,17.414 ccw(c27.364,17.161) 27.364,17.519 ccw(c27.364,17.878) C2.1@27.617,17.624 ; C2.1@27.827,17.414 cw(c28.08,17.161) 28.08,17.519 cw(c28.08,17.878) C2.1@27.827,17.624 ; R1.2@28.615,17.414 ccw(c28.362,17.161) 28.362,17.519 ccw(c28.362,17.878) R1.2@28.615,17.624
NetC14_2: C14.2 C15.1 R3.2 U1.P12 | length 7.7
  Top Layer w0.254: U1.P12@24.425,17.144 26.044,15.524 v2(26.044,15.426) ; 25.845,15.724 cw(c25.547,15.426) v2@25.968,15.426
  Bottom Layer w0.254: v2(26.044,15.426) C14.2@26.724,15.426 C15.1@27.722,15.426 R3.2@28.72,15.426 ; C14.2@26.637,15.339 ccw(c26.427,15.129) 26.427,15.426 ccw(c26.427,15.723) C14.2@26.637,15.513 ; C14.2@26.811,15.339 cw(c27.021,15.129) 27.021,15.426 cw(c27.021,15.723) C14.2@26.811,15.513 ; C15.1@27.635,15.339 ccw(c27.425,15.129) 27.425,15.426 ccw(c27.425,15.723) C15.1@27.635,15.513 ; C15.1@27.809,15.339 cw(c28.019,15.129) 28.019,15.426 cw(c28.019,15.723) C15.1@27.809,15.513 ; R3.2@28.633,15.339 ccw(c28.423,15.129) 28.423,15.426 ccw(c28.423,15.723) R3.2@28.633,15.513
NetC16_2: C16.2 C17.1 U1.P8 | length 6.7
  Top Layer w0.127: U1.P8@21.825,17.057 cw(c21.825,16.848) 21.973,16.996 cw(c22.12,17.144) U1.P8@21.912,17.144 ; U1.P8@21.825,17.144 v2@22.098,16.871 ; U1.P8@21.847,17.069 cw(c21.682,16.783) v2@22.011,16.808 ; U1.P8@21.9,17.122 ccw(c22.186,17.287) v2@22.161,16.958 ; 21.94,17.015 cw(c21.863,16.881) v2@22.014,16.849 ; 21.954,17.028 ccw(c22.087,17.105) v2@22.12,16.955 ; v2@22.01,16.819 ccw(c21.673,16.819) 21.912,17.057 ccw(c22.15,17.296) v2@22.15,16.958
  Bottom Layer w0.127: C17.1@21.991,15.171 ccw(c21.673,15.489) 22.123,15.489 ccw(c22.573,15.489) C17.1@22.255,15.171 ; C16.2@21.991,15.923 cw(c21.673,15.605) 22.123,15.605 cw(c22.573,15.605) C16.2@22.255,15.923 ; C16.2@21.991,16.187 ccw(c21.673,16.505) 22.123,16.505 ccw(c22.573,16.505) C16.2@22.255,16.187 ; v2@22.051,16.72 cw(c21.878,16.546) 22.123,16.546 ; C17.1@22.123,15.039 C16.2@22.123,16.055 22.123,16.792 v2(22.15,16.819) ; 22.123,16.417 cw(c22.552,16.417) v2@22.249,16.72
NetC18_2: C18.2 C19.1 U1.P10 | length 10.6
  Top Layer w0.127: U1.P10@23.064,17.082 cw(c22.916,16.935) 23.125,16.935 cw(c23.334,16.935) U1.P10@23.186,17.082 ; U1.P10@23.125,17.144 23.125,15.864 25.295,13.694 25.295,10.436 24.232,9.373 C18.2@24.122,9.373 C19.1@24.122,8.331
NetC21_1: C21.1 U1.M10 | length 4
  Top Layer w0.127: U1.M10@23.125,18.357 cw(c23.125,18.148) 23.273,18.296 cw(c23.42,18.444) U1.M10@23.212,18.444 ; U1.M10@23.125,18.444 v3(23.45,18.119) ; v3@23.336,18.119 ccw(c23.06,18.119) 23.255,18.314 ccw(c23.45,18.509) v3@23.45,18.233
  Bottom Layer w0.127: v3@23.437,18.119 ccw(c23.809,18.119) 23.546,17.856 ; v3(23.45,18.119) 23.45,17.952 23.987,17.415 ; v3@23.564,18.119 ccw(c24.242,18.119) 23.763,17.639 ; C21.1@24.25,17.294 ccw(c23.987,17.069) 23.987,17.415 ; C21.1@24.25,17.536 cw(c23.987,17.761) 23.987,17.415 ; C21.1@24.392,17.415 23.987,17.415
NetC23_2: C23.2 R12.2 R13.1 U2.3 | length 10
  Top Layer w0.254: R12.2@9.726,7.728 cw(c9.26,7.262) 9.919,7.262 cw(c10.578,7.262) R12.2@10.112,7.728 ; U2.3@9.771,6.759 ccw(c9.413,7.117) 9.919,7.117 ; 9.919,7.505 ccw(c10.973,7.505) 10.227,6.759 ccw(c10.89,7.421) 10.89,6.485 ; R12.2@9.919,8.001 9.919,6.461 9.942,6.485 C23.2@12.272,6.485 R13.1@12.272,5.304 ; U2.3@10.227,6.302 cw(c10.668,5.862) 10.668,6.485 ; R13.1@12.185,5.391 ccw(c11.975,5.601) 12.272,5.601 ccw(c12.569,5.601) R13.1@12.359,5.391 ; C23.2@12.185,6.572 cw(c11.975,6.782) 11.975,6.485 cw(c11.975,6.188) 12.185,6.398 cw(c11.975,6.188) 12.272,6.188 cw(c12.569,6.188) C23.2@12.359,6.398
NetC31_2: C31.2 R6.2 R16.1 U1.N11 | length 13.3
  Top Layer w0.127: U1.N11@23.775,17.707 cw(c23.775,17.498) 23.923,17.646 cw(c24.07,17.794) U1.N11@23.862,17.794 ; U1.N11@23.775,17.794 24.1,17.469 24.1,16.506 24.202,16.404
  Top Layer w0.254: 24.202,16.404 26.754,13.852 29.079,13.852 R16.1@30.083,12.848 30.083,11.364 C31.2@30.022,11.303 30.606,10.719 32.012,10.719 R6.2@32.156,10.863
NetC32_2: C32.2 R16.2 R17.2 U1.P11 Y1.3 | length 24.7
  Top Layer w0.254: U1.P11@23.775,17.144 23.775,16.187 27.114,12.848 ; Y1.3@27.705,7.82 cw(c27.153,7.269) 27.933,7.269 cw(c28.713,7.269) Y1.3@28.161,7.82 ; R16.2@27.71,12.557 ccw(c27.114,12.093) 27.114,12.848 ; R16.2@27.71,13.139 cw(c27.114,13.603) 27.114,12.848 ; R16.2@27.757,12.455 cw(c27.036,11.696) 28.083,11.696 ; R17.2@27.799,6.48 ccw(c27.474,6.805) 27.933,6.805 ; 27.933,7.158 ccw(c29.145,7.158) R17.2@28.288,6.301 ; Y1.3@27.933,7.771 ccw(c29.758,7.771) R17.2@28.467,6.48 ; 27.98,7.594 cw(c28.398,7.705) Y1.3@28.083,8.001 ; Y1.3@28.033,8.372 ccw(c28.033,8.91) 28.414,8.529 ; 28.097,7.152 cw(c28.789,7.336) Y1.3@28.268,7.827 ; R17.2@28.133,6.096 27.933,6.296 Y1.3@27.933,8.049 28.993,9.109 28.993,10.786 C32.2@28.476,11.303 28.083,11.696 ; C32.2@28.353,11.303 ccw(c28.056,11.303) 28.266,11.513 ccw(c28.476,11.723) C32.2@28.476,11.426 ; Y1.3@28.356,8.049 cw(c29.377,8.049) 28.655,8.771 ; R16.2@28.409,12.455 ccw(c29.13,11.696) 28.083,11.696 ; C32.2@28.476,11.18 cw(c28.476,10.883) 28.686,11.093 cw(c28.896,11.303) C32.2@28.599,11.303 ; 27.114,12.848 R16.2@28.083,12.848 28.083,11.696
NetC33_2: C33.2 U1.N9 Y2.1 | length 7.2
  Top Layer w0.127: U1.N9@22.475,17.707 cw(c22.475,17.498) 22.623,17.646 cw(c22.77,17.794) U1.N9@22.562,17.794 ; U1.N9@22.475,17.794 22.8,17.469 22.8,13.078 C33.2@23,12.878 23,11.312 Y2.1@23.11,11.201
NetC34_2: C34.2 U1.P9 Y2.2 | length 6.7
  Top Layer w0.127: Y2.2@21.51,11.201 21.679,11.37 C34.2@21.679,12.878 21.679,13.186 22.518,14.026 22.518,17.1 U1.P9@22.475,17.144 ; U1.P9@22.414,17.082 cw(c22.162,16.83) 22.518,16.83
NetC35_1: C35.1 R18.1 U1.K3 | length 17.4
  Top Layer w0.203: v3@18.25,19.992 cw(c18.25,19.808) 18.38,19.939 cw(c18.51,20.069) v3@18.326,20.069 ; v3(18.25,20.069) U1.K3@18.575,19.744
  L3 w0.381: v1(11.557,17.399) 12.675,17.399 15.344,20.069 v3(18.25,20.069)
  Bottom Layer w0.127: R18.1@10.532,18.307 cw(c9.957,17.733) 10.77,17.733 cw(c11.582,17.733) R18.1@11.008,18.307 ; R18.1@10.621,18.397 cw(c10.264,18.04) 10.77,18.04 cw(c11.275,18.04) R18.1@10.918,18.397 ; C35.1@10.638,17.523 ccw(c10.319,17.841) 10.77,17.841 ccw(c11.22,17.841) 10.901,17.523 ccw(c11.22,17.841) 11.22,17.391 ccw(c11.22,16.941) C35.1@10.901,17.259 ; R18.1@10.77,18.545 C35.1@10.77,17.391 11.549,17.391 v1(11.557,17.399) ; 11.078,17.391 ccw(c11.078,17.878) v1@11.422,17.534 ; 11.116,17.391 cw(c11.116,16.958) v1@11.422,17.264
  Bottom Layer w0.381: R18.1@10.621,18.397 cw(c10.264,18.04) 10.77,18.04 cw(c11.275,18.04) R18.1@10.918,18.397 ; R18.1@10.77,18.545 C35.1@10.77,17.391 10.778,17.399 v1(11.557,17.399)
NetC44_2: C44.2 R22.2 U1.N6 | length 8.2
  Top Layer w0.127: 20.106,16.499 20.21,16.603 20.21,17.479 U1.N6@20.525,17.794 ; U1.N6@20.439,17.794 cw(c20.23,17.794) 20.377,17.646 cw(c20.525,17.498) U1.N6@20.525,17.707
  Top Layer w0.381: R22.2@17.512,12.286 17.551,12.325 v1(17.551,12.979) 17.551,13.945 20.106,16.499
  Bottom Layer w0.381: v1(17.551,12.979) 17.87,12.661 C44.2@17.87,12.032
NetC49_2: C49.2 R23.2 U1.P6 | length 6.8
  Top Layer w0.254: U1.P6@20.525,17.144 20.55,17.118 20.55,16.08
  Top Layer w0.381: R23.2@18.528,12.286 v1(18.528,13.005) 18.528,14.058 20.55,16.08
  Bottom Layer w0.381: v1(18.528,13.005) 18.818,12.715 C49.2@18.818,12.032
NetGPANIO1_1: GPANIO1.1 U1.N10 | length 14
  Top Layer w0.127: U1.N10@23.125,17.707 cw(c23.125,17.498) 23.273,17.646 cw(c23.42,17.794) U1.N10@23.212,17.794 ; U1.N10@23.125,17.794 23.45,17.469 23.45,15.92 25.62,13.75 GPANIO1.1@25.62,7.982 ; GPANIO1.1@25.311,8.391 ccw(c24.566,9.136) 25.62,9.136 ccw(c26.674,9.136) GPANIO1.1@25.929,8.391 ; GPANIO1.1@25.401,8.301 ccw(c24.873,8.829) 25.62,8.829 ccw(c26.367,8.829) GPANIO1.1@25.839,8.301
NetL1_1: L1.1 U1.M1 U1.M2 | length 0.7
  Top Layer w0.229: U1.M1@17.275,18.444 U1.M2@17.925,18.444
NetLED1_1: LED1.1 R9.2 | length 3.5
  Top Layer w0.254: R9.2@34.671,5.804 35.413,6.546 ; R9.2@34.671,5.927 ccw(c34.671,6.224) 34.881,6.014 ccw(c35.091,5.804) R9.2@34.794,5.804 ; LED1.1@35.936,6.304 ccw(c35.413,5.858) 35.413,6.546 ; LED1.1@35.936,6.788 cw(c35.413,7.234) 35.413,6.546 ; LED1.1@36.22,6.546 35.413,6.546
NetLED2_1: LED2.1 R10.2 | length 1.5
  Top Layer w0.254: R10.2@31.519,5.804 32.659,5.804 LED2.1@32.893,6.038
NetR6_1: R6.1 R35.2 Y1.1 | length 2.9
  Top Layer w0.254: Y1.1@30.333,9.849 30.348,9.863 R6.1@32.156,9.863 R35.2@33.198,9.863
NetR11_2: R11.2 R12.1 | length 3.7
  Top Layer w0.254: R12.1@8.148,8.294 ccw(c7.37,9.271) R11.2@8.619,9.271 8.619,8.301 R12.1@8.319,8.001 ; R12.1@8.307,8.096 ccw(c7.79,8.743) 8.619,8.743 ; R11.2@8.532,9.184 cw(c8.322,8.974) 8.619,8.974 cw(c8.916,8.974) R11.2@8.706,9.184
NetR13_2: R13.2 R14.1 U2.2 | length 5.8
  Top Layer w0.254: U2.2@10.949,4.081 11.173,4.304 R13.2@12.272,4.304 R14.1@13.284,4.304 ; U2.2@10.998,4.082 cw(c11.535,3.545) 11.535,4.304 ; U2.2@11.177,3.902 cw(c12.148,2.932) R13.2@12.148,4.304 ; 11.902,4.239 cw(c12.007,3.846) R13.2@12.21,4.198 ; R13.2@12.185,4.218 ccw(c11.975,4.008) 11.975,4.304 ccw(c11.975,4.601) R13.2@12.185,4.391 ; R13.2@12.359,4.218 cw(c12.569,4.008) 12.569,4.304 cw(c12.569,4.601) R13.2@12.359,4.391 ; R14.1@13.197,4.218 ccw(c12.987,4.008) 12.987,4.304 ccw(c12.987,4.601) R14.1@13.197,4.391
NetR26_2: R26.2 R33.1 U3.7 | length 6.4
  Bottom Layer w0.254: R26.2@7.236,8.289 cw(c6.432,7.484) R33.1@7.57,7.484 ; R26.2@7.416,8.469 cw(c7.045,8.098) R26.2@7.57,8.098 ; R33.1@7.463,7.408 ccw(c7.1,7.617) 7.505,7.726 ; R33.1@7.483,7.433 ccw(c7.273,7.643) 7.57,7.643 ccw(c7.867,7.643) 7.657,7.433 ccw(c7.88,7.656) 7.88,7.341 ; R33.1@7.499,7.411 7.57,7.341 U3.7@9.665,7.341 ; R33.1@7.57,7.346 R26.2@7.57,8.422 ; R33.1@7.657,7.259 cw(c7.854,7.062) 7.854,7.341 ; U3.7@9.086,7.236 ccw(c8.833,6.983) 8.833,7.341 ccw(c8.833,7.698) U3.7@9.086,7.445
NetR27_2: R27.2 R32.1 U3.3 | length 7.5
  Bottom Layer w0.203: U3.3@17.665,6.071 19.566,6.071 R27.2@19.744,5.893 ; U3.3@18.263,5.948 cw(c18.559,5.652) 18.559,6.071 cw(c18.559,6.489) U3.3@18.263,6.193 ; 19.131,6.071 cw(c19.131,5.279) R27.2@19.691,5.839 ; 19.232,6.071 ccw(c19.232,6.72) R27.2@19.691,6.261 ; R27.2@19.82,5.888 R27.2@19.902,5.97 19.902,5.676 R32.1@20.628,4.95 ; R27.2@19.997,5.89 ccw(c20.744,5.89) 20.216,5.362 ; R27.2@20.2,5.89 ccw(c21.437,5.89) 20.562,5.015 ; R32.1@20.664,4.765 ccw(c20.306,4.765) 20.559,5.018 ccw(c20.813,5.271) R32.1@20.813,4.913
NetR28_2: R28.2 R30.2 U3.1 | length 5.3
  Bottom Layer w0.203: U3.1@17.665,8.611 19.696,8.611 R28.2@19.744,8.658 R30.2@19.744,9.66 ; U3.1@18.263,8.488 cw(c18.559,8.192) 18.559,8.611 cw(c18.559,9.029) U3.1@18.263,8.733 ; 19.271,8.611 ccw(c19.271,9.131) 19.639,8.763 ccw(c19.386,9.016) 19.744,9.016 ccw(c20.102,9.016) R28.2@19.849,8.763 ; R30.2@19.639,9.555 cw(c19.386,9.302) 19.744,9.302 cw(c20.102,9.302) R30.2@19.849,9.555
NetR29_1: R29.1 U3.5 | length 3.4
  Bottom Layer w0.203: R29.1@7.57,4.674 R29.1@7.62,4.724 ; R29.1@7.57,4.809 9.657,4.809 U3.5@9.665,4.801 ; R29.1@7.675,4.704 cw(c7.928,4.45) 7.928,4.809 cw(c7.928,5.167) R29.1@7.675,4.914 ; 8.752,4.809 cw(c8.752,4.363) U3.5@9.068,4.678 ; 8.791,4.809 ccw(c8.791,5.2) U3.5@9.068,4.923
NetR31_1: R31.1 U3.2 | length 3.2
  Bottom Layer w0.203: U3.2@17.665,7.341 19.679,7.341 R31.1@19.744,7.275 ; U3.2@18.263,7.218 cw(c18.559,6.922) 18.559,7.341 cw(c18.559,7.759) U3.2@18.263,7.463 ; 19.228,7.341 cw(c19.228,6.76) R31.1@19.639,7.171
NetR34_2: R34.2 U3.6 | length 3.2
  Bottom Layer w0.254: R34.2@7.57,5.969 7.671,6.071 U3.6@9.665,6.071 ; R34.2@7.657,5.882 cw(c8.112,5.427) 8.112,6.071 ; U3.6@9.086,5.966 ccw(c8.833,5.713) 8.833,6.071 ccw(c8.833,6.428) U3.6@9.086,6.175
NetR36_1: R36.1 R37.1 Y1.4 | length 3.4
  Top Layer w0.254: Y1.4@30.333,8.049 31.925,8.049 R36.1@32.156,7.817 32.198,7.817 R37.1@33.198,8.817
NVCC_GPIO_3V3: C39.2 C40.2 C41.2 C42.2 R20.2 U1.E9 U1.F10 U1.J10 | length 15.2
  Top Layer w0.203: U1.E9@22.475,22.994 v2(22.8,23.319) ; v2@22.698,23.319 cw(c22.453,23.319) 22.627,23.145 cw(c22.8,22.972) v2@22.8,23.217 ; U1.J10@23.125,20.394 v2(23.45,20.069) ; U1.F10@23.125,22.344 v2(23.45,22.669) ; v2@23.348,20.069 ccw(c23.103,20.069) 23.277,20.242 ccw(c23.45,20.415) v2@23.45,20.17 ; v2@23.348,22.669 cw(c23.103,22.669) 23.277,22.495 cw(c23.45,22.322) v2@23.45,22.567
  Bottom Layer w0.305: 22.8,20.719 v2(23.45,20.069)
  Bottom Layer w0.381: 22.8,20.719 22.8,21.044 ; v2(22.8,23.319) 22.8,22.669 ; 22.821,22.911 23.063,22.669 ; 23.063,22.641 23.063,22.669 ; v2(23.45,22.669) 23.063,22.669 ; 22.8,21.044 22.8,21.824 ; 22.8,21.044 23.186,21.43 23.194,21.43 22.8,21.824 ; 22.8,21.824 22.8,22.405 ; 22.8,22.405 22.8,22.669 ; 22.8,22.405 23.063,22.669 ; 22.8,22.669 23.063,22.669
  Bottom Layer w0.508: 22.919,21.43 23.186,21.43 ; 23.194,21.43 C39.2@25.392,21.43 C40.2@26.335,21.43 C42.2@27.277,21.43 C41.2@28.219,21.43 28.961,21.43 R20.2@29.388,21.857
NVCC_SD: C47.2 C48.2 C50.2 C51.2 R24.1 U1.J6 U1.K5 | length 9.7
  Top Layer w0.203: U1.K5@19.875,19.744 v2(20.2,20.069) ; v2@20.098,20.069 cw(c19.853,20.069) 20.027,19.895 cw(c20.2,19.722) v2@20.2,19.967 ; v2@20.2,20.617 cw(c20.2,20.372) 20.373,20.545 cw(c20.547,20.719) v2@20.302,20.719 ; v2(20.2,20.719) U1.J6@20.525,20.394
  Bottom Layer w0.381: 19.633,21.336 20.2,20.769 v2(20.2,20.719) v2(20.2,20.069)
  Bottom Layer w0.508: C50.2@16.858,21.43 C48.2@16.858,22.378 C47.2@16.858,23.326 C51.2@16.858,24.274 R24.1@16.858,25.223 ; C50.2@16.951,21.336 19.633,21.336
NVCC_SEMC_3V3: C36.2 C37.2 C38.2 R19.2 U1.E6 U1.F5 | length 10.2
  Top Layer w0.203: U1.F5@19.875,22.344 v2(20.2,22.019) ; v2@20.098,22.019 ccw(c19.853,22.019) 20.027,22.192 ccw(c20.2,22.365) v2@20.2,22.12 ; U1.E6@20.525,22.994 v2(20.85,23.319) ; v2@20.748,23.319 cw(c20.503,23.319) 20.677,23.145 cw(c20.85,22.972) v2@20.85,23.217
  L4 w0.203: v2(20.2,22.019) 20.85,22.669 v2(20.85,23.319) ; v2@20.2,22.12 ccw(c20.2,22.365) 20.373,22.192 ccw(c20.547,22.019) v2@20.302,22.019 ; v2@20.778,23.247 cw(c20.605,23.073) 20.85,23.073 cw(c21.095,23.073) v2@20.922,23.247
  Bottom Layer w0.305: v2(20.85,23.319) 21.409,23.877
  Bottom Layer w0.508: R19.2@18.276,26.119 C36.2@19.317,26.119 C37.2@20.357,26.119 C38.2@21.398,26.119 21.409,26.108 21.409,23.877